# Altium PCB plata_sredn.PcbDoc
Units mm, origin at the board's own origin, x right, y up, seen from the top; angles counter-clockwise.
Board outline 160 x 100 mm, 2 copper layers (Top Layer, Bottom Layer); 18 components, 16 nets, 74 pads, 0 vias.
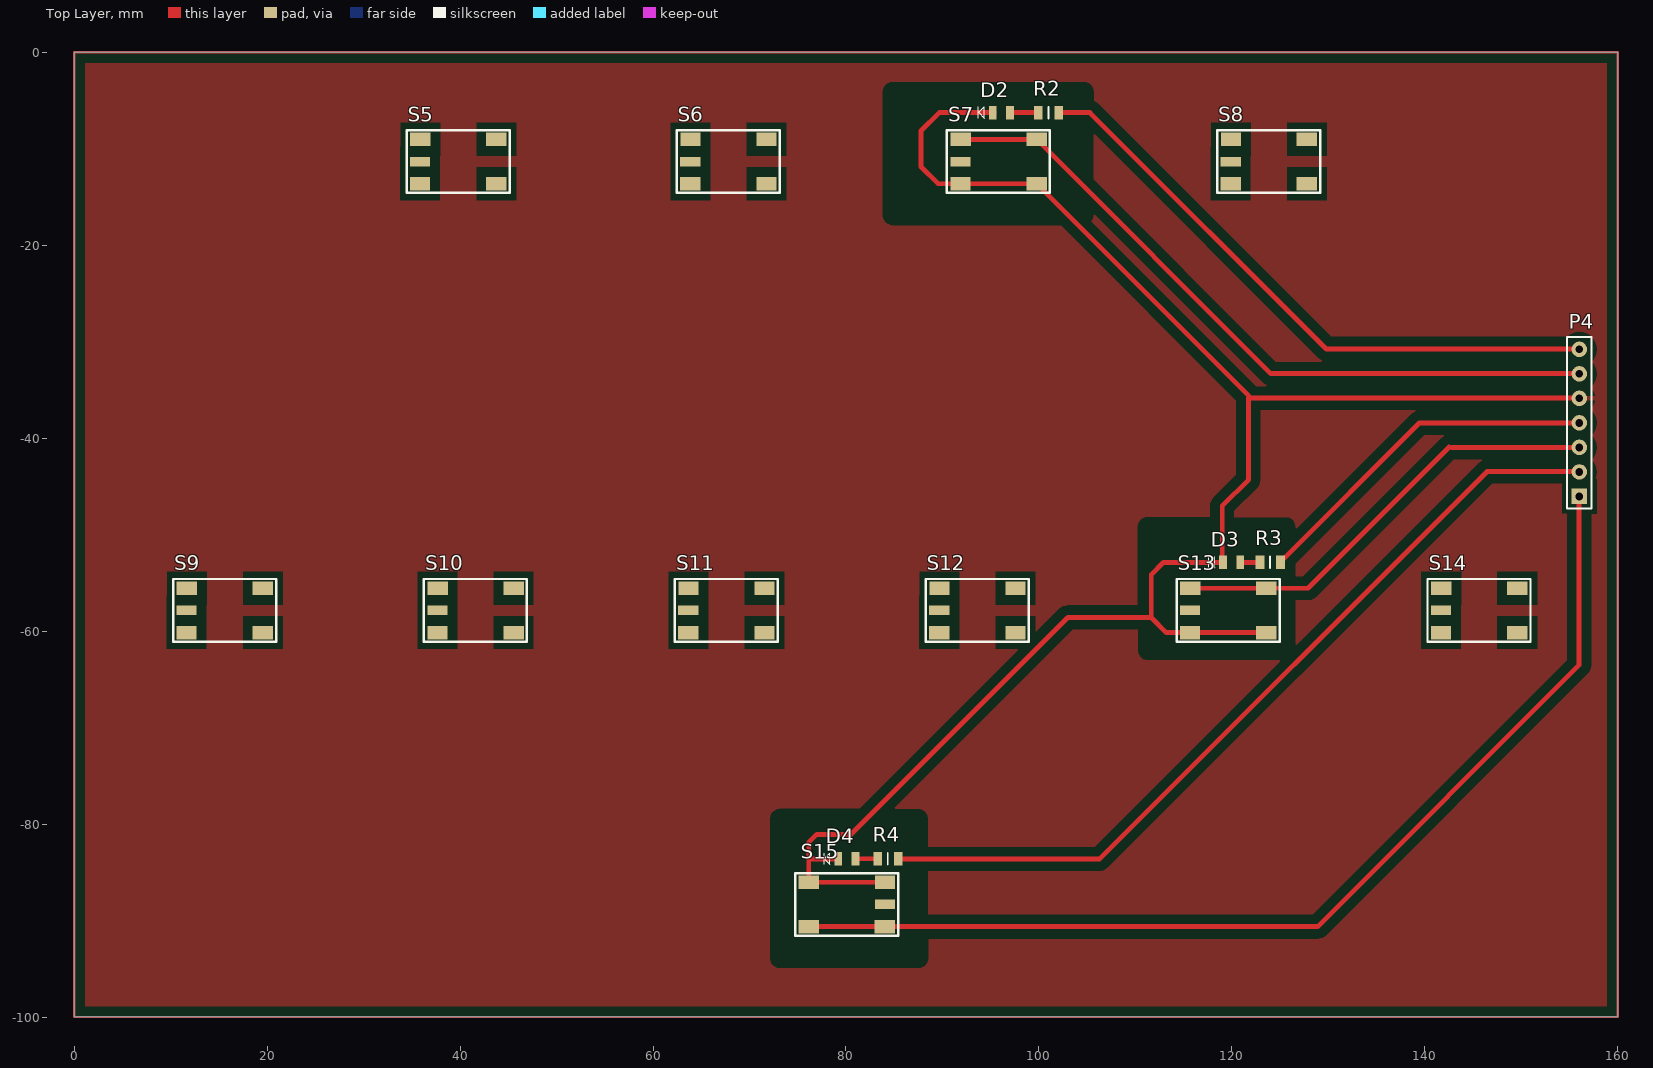
[diagram p0: Top Layer view]
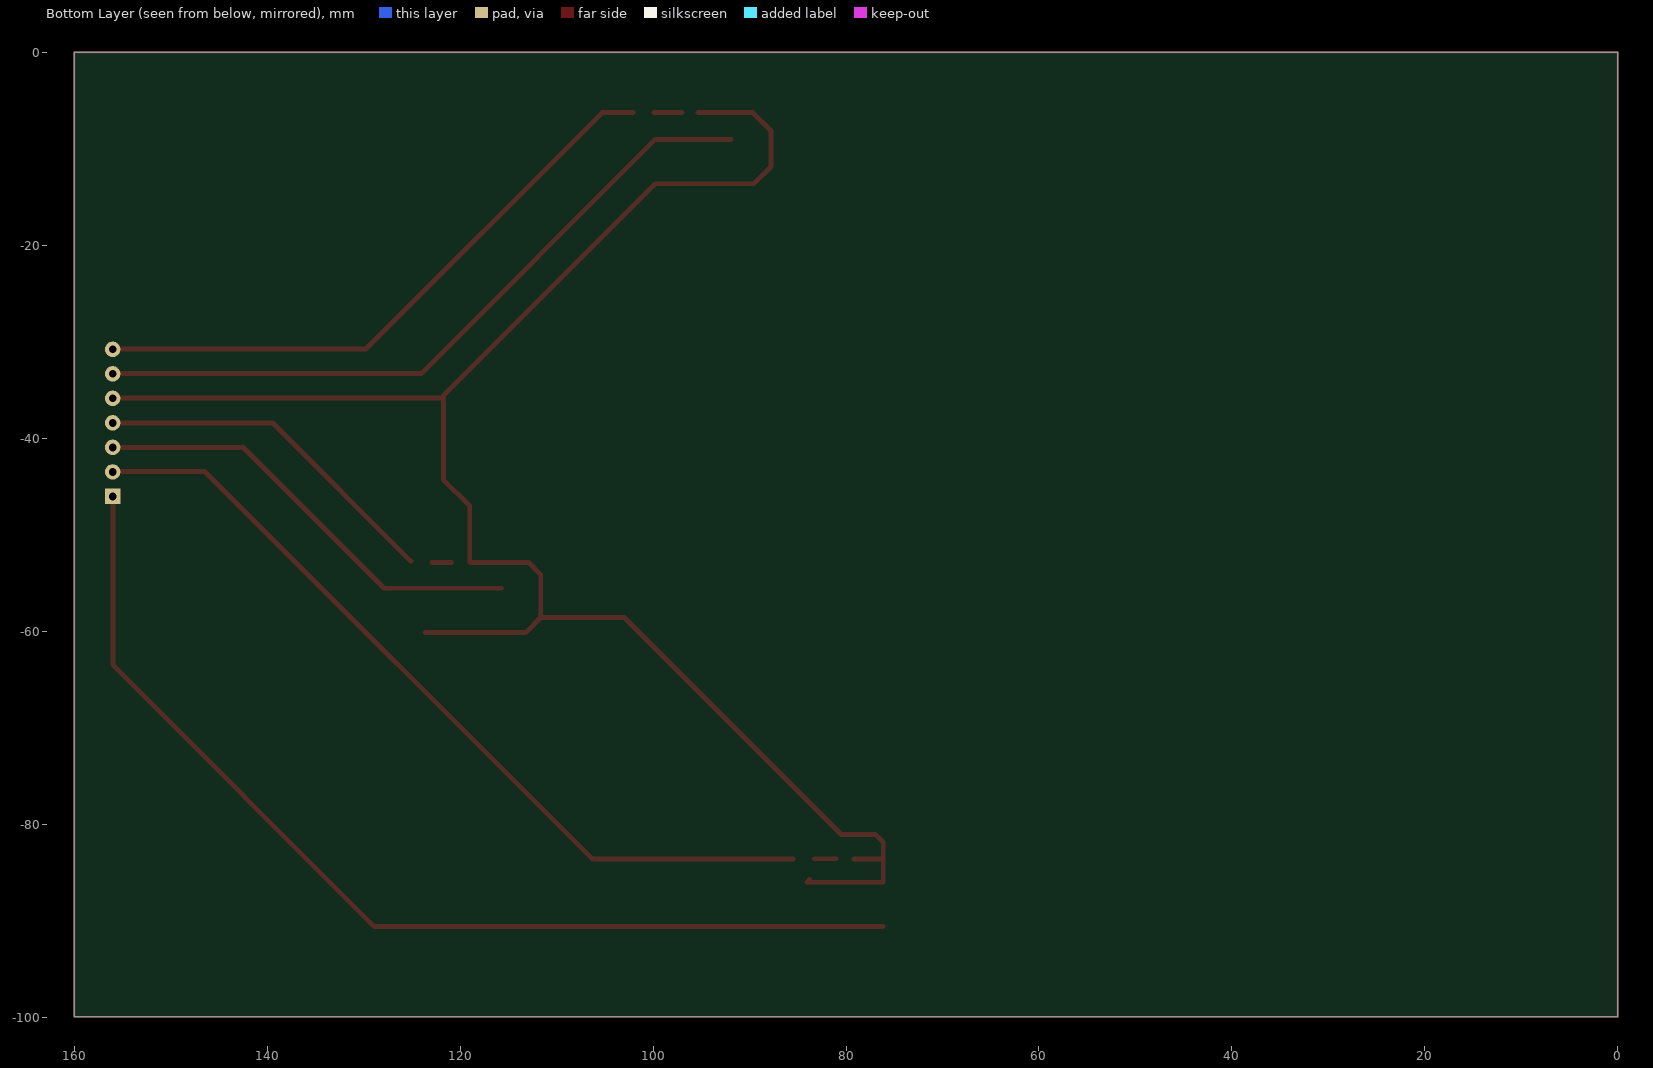
[diagram p1: Bottom Layer view, seen from below]

## Layer stack, top to bottom
Top Solder: solder mask 0.0102, Solder Resist, Dk 3.5
Top Layer: signal copper 0.0356
Dielectric 1: dielectric 0.32, FR-4, Dk 4.8
Bottom Layer: signal copper 0.0356
Bottom Solder: solder mask 0.0102, Solder Resist, Dk 3.5

## Board outline
0,-99.949 160,-99.949 160,0.051 0,0.051

## Design rules (kind name [scope] priority, off if disabled: settings)
Clearance [All] p1: gap=0.8
PlaneConnect [All] p1: planeconnectstyle=Relief reliefexpansion=0.6 reliefentries=4 reliefconductorwidth=0.5 reliefairgap=0.8
PolygonConnect [All] p1: connectstyle=Relief reliefconductorwidth=0.5 reliefentries=4 polygonreliefangle="90 Angle" airgapwidth=0.8
RoutingVias [All] p1: holewidth=0.711 width=1.27 viastyle="Through Hole" minholewidth=0.711 minwidth=1.27 maxholewidth=0.711 maxwidth=1.27
SolderMaskExpansion [All] p1: expansion=0.102
Width [All] p1: maxlimit=0.5 minlimit=0.3 preferedwidth=0.5
28 further rules are at their usual default settings.

## Classes and differential pairs
component class plata_nizhn: R2

## Components (designator, comment, footprint, x,y, rotation, side; value= is the part's Value field where it differs from the comment)
D2 "LED0" LED0805 96.774,-6.223 r180 top
D3 "LED0" LED0805 120.65,-52.832 r180 top
D4 "LED0" LED0805 80.772,-83.566 r180 top
P4 "Header 7" HDR1X7 156,-46 r90 top
R2 "250" 6-0805_N 100.965,-6.223 r0 top
R3 "250" 6-0805_N 123.952,-52.832 r0 top
R4 "250" 6-0805_N 84.328,-83.566 r0 top
S5 "К" STMW 39.8,-11.3 r0 top
S6 "О" STMW 67.8,-11.3 r0 top
S7 "М" STMW 95.8,-11.3 r0 top
S8 "У" STMW 123.8,-11.3 r0 top
S9 "Г" STMW 15.6,-57.81 r0 top
S10 "О" STMW 41.6,-57.81 r0 top
S11 "Л" STMW 67.6,-57.81 r0 top
S12 "О" STMW 93.6,-57.81 r0 top
S13 "В" STMW 119.6,-57.81 r0 top
S14 "У" STMW 145.6,-57.81 r0 top
S15 "С" STMW 80.1,-88.28 r180 top

## Footprints (in the part's own frame and the unit in brackets; to place one, negate y for a bottom-side part, rotate by r counter-clockwise, add the part's x,y. Pads: shape width x height; smd on the part's side, far side on the other; paste and mask are expansions set on the pad)
6-0805_N [mm] "Chip Resistor, Body 2.0x1.2mm, IPC Medium Density"
  rect 0.9x1.4 smd: 1(-1.039,0.009) 2(1.078,-0.007)
  silkscreen extent 0,-0.6 0,0.6, body extent -1.07,-0.7 1.07,0.7, height 0.7
HDR1X7 [mm] "Connector; Header; 7 Position"
  rect 1.6x1.6 hole 0.8: 1(0,0)
  round 1.6 hole 0.8: 2(2.54,0) 3(5.08,0) 4(7.62,0) 5(10.16,0) 6(12.7,0) 7(15.24,0)
  silkscreen extent -1.27,-1.27 16.51,1.27
LED0805 [mm] "Chip Resistor, Body 2.0x1.2mm, IPC High Density"
  rect 0.8x1.4 smd: 1(-0.219,0.008) 2(1.578,0.008)
  silkscreen extent 2.45,-0.6 3.05,0.57, body extent -0.43,-0.72 1.78,0.72, height 1.4
STMW [mm]
  rect 2.1x1 smd: 0(-3.938,0)
  rect 2.1x1.4 smd: 1(-3.912,2.3) 1(3.962,2.3) 2(-3.938,-2.3) 2(3.962,-2.3)
  silkscreen extent -5.34,-3.25 5.34,3.25

## Part data
D2 D3 D4: "Typical INFRARED GaAs LED"
P4: "Header, 7-Pin"
R2 R3 R4: library part Res2, "Resistor"
S5 S6 S7 S8 S9 S10 S11 S12 S13 S14 S15: library part STMW, "Switch"

## Nets (pads, with @x,y where several pads share a name; then routed paths per layer and width w, separated by ;. In a path a pad name is that pad's centre, name@x,y a point inside that pad or via, vN(x,y) a via of type N, cw(c..) or ccw(c..) an arc to the next point about the centre after c; other vN are vias at no path point)
A1: P4.3 S13.1 | length 46.4
  Top Layer w0.5: S13.1@115.688,-55.51 123.562,-55.51 127.878,-55.51 142.494,-40.894 ; 142.792,-40.92 P4.3 ; P4.3@155.702,-40.894 P4.3@155.956,-40.64
A2: P4.1 S15.1 | length 108.8
  Top Layer w0.5: S15.1@76.138,-90.58 84.012,-90.58 128.876,-90.58 155.956,-63.5 P4.1@155.956,-45.72
A3: 
A4: P4.6 S7.1 | length 74.2
  Top Layer w0.5: S7.1@91.887,-9 99.762,-9 124.036,-33.274 155.702,-33.274 P4.6@155.956,-33.02
GND: D2.2 D3.2 D4.2 P4.5 S7.2 S13.2 S15.2 | length 193.9
  Top Layer w0.5: 76.146,-83.574 D4.2 ; S15.2@83.757,-85.699 84.038,-85.98 76.138,-85.98 76.138,-81.85 76.962,-81.026 80.518,-81.026 102.997,-58.547 111.633,-58.547 ; D2.2@95.349,-6.223 89.662,-6.223 87.757,-8.128 87.757,-11.811 89.546,-13.6 91.862,-13.6 99.762,-13.6 121.722,-35.56 ; S13.2@123.562,-60.11 115.662,-60.11 113.196,-60.11 111.633,-58.547 ; P4.5@155.956,-35.56 155.702,-35.814 121.722,-35.814 121.722,-44.267 118.999,-46.99 118.999,-52.832 112.903,-52.832 111.633,-54.102 111.633,-58.547
LED1: P4.4 R3.2 | length 36.8
  Top Layer w0.5: R3.2@125.095,-52.705 139.433,-38.367 ; 139.446,-38.38 P4.4
LED2: P4.2 R4.2 | length 87.2
  Top Layer w0.5: R4.2@85.471,-83.566 106.299,-83.566 146.431,-43.434 155.702,-43.434 P4.2@155.956,-43.18
LED3: 
LED4: P4.7 R2.2 | length 64.2
  Top Layer w0.5: R2.2@102.05,-6.223 105.283,-6.223 129.794,-30.734 155.702,-30.734 P4.7@155.956,-30.48
NetD1_1: 
NetD1_2: 
NetD2_1: D2.1 R2.1 | length 2.9
  Top Layer w0.5: D2.1@97.01,-6.214 R2.1
NetD3_1: D3.1 R3.1 | length 2
  Top Layer w0.5: D3.1 R3.1@122.896,-52.84
NetD4_1: D4.1 R4.1 | length 2.3
  Top Layer w0.5: D4.1@81.008,-83.557 R4.1
NetP1_1: 
NetP2_1: 
pads on no net: S5.0 S5.1 S5.2 S6.0 S6.1 S6.2 S7.0 S8.0 S8.1 S8.2 S9.0 S9.1 S9.2 S10.0 S10.1 S10.2 S11.0 S11.1 S11.2 S12.0 S12.1 S12.2 S13.0 S14.0 S14.1 S14.2 S15.0
copper on no net: | length 520
  Top Layer w0.254: 0,-99.949 160,-99.949 160,0.051 0,0.051 0,-99.949

## Polygon pours and split planes (outlines as drawn)
GND on Top Layer "Bottom Layer-No Net" (solid, pour order 9): 0,0.051 160,0.051 160,-99.949 0,-99.949